# Altium PCB FI_10_7.PcbDoc
Units mm, origin at the board's own origin, x right, y up, seen from the top; angles counter-clockwise.
Board outline 65 x 37 mm, 2 copper layers (Top Layer, Bottom Layer), stack 1.571 mm thick; 58 components, 31 nets, 137 pads, 2 vias.
Unrouted connection lines stored in the file: 2.
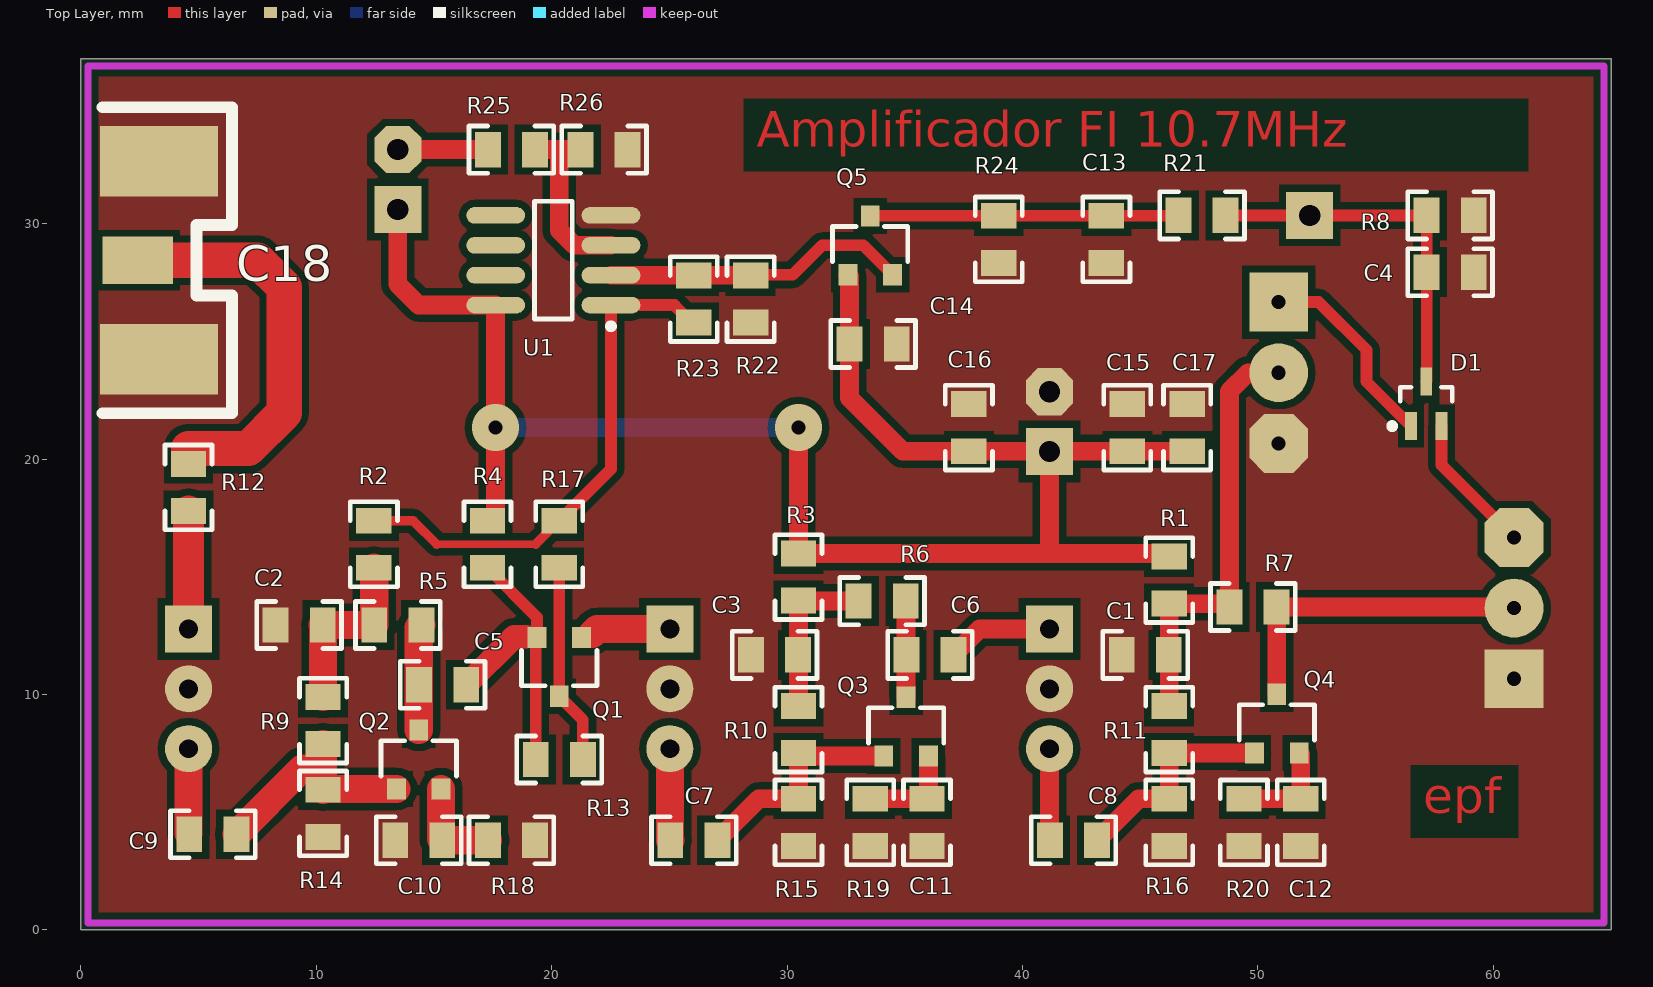
[diagram p0: Top Layer view]
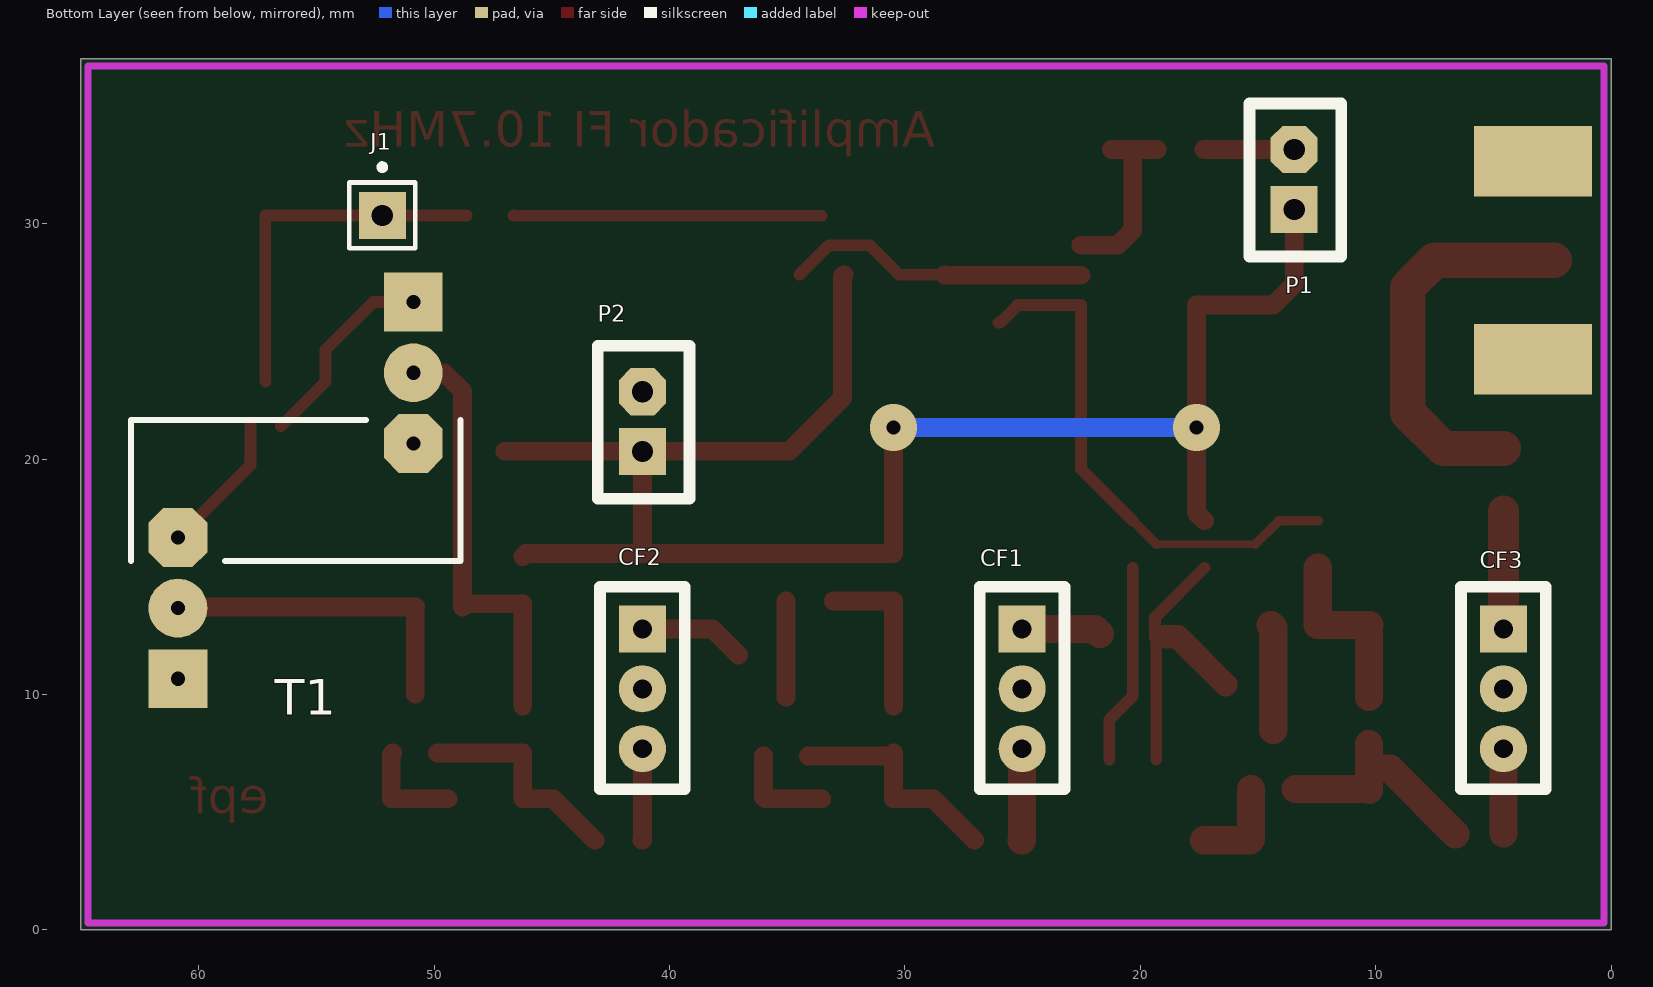
[diagram p1: Bottom Layer view, seen from below]
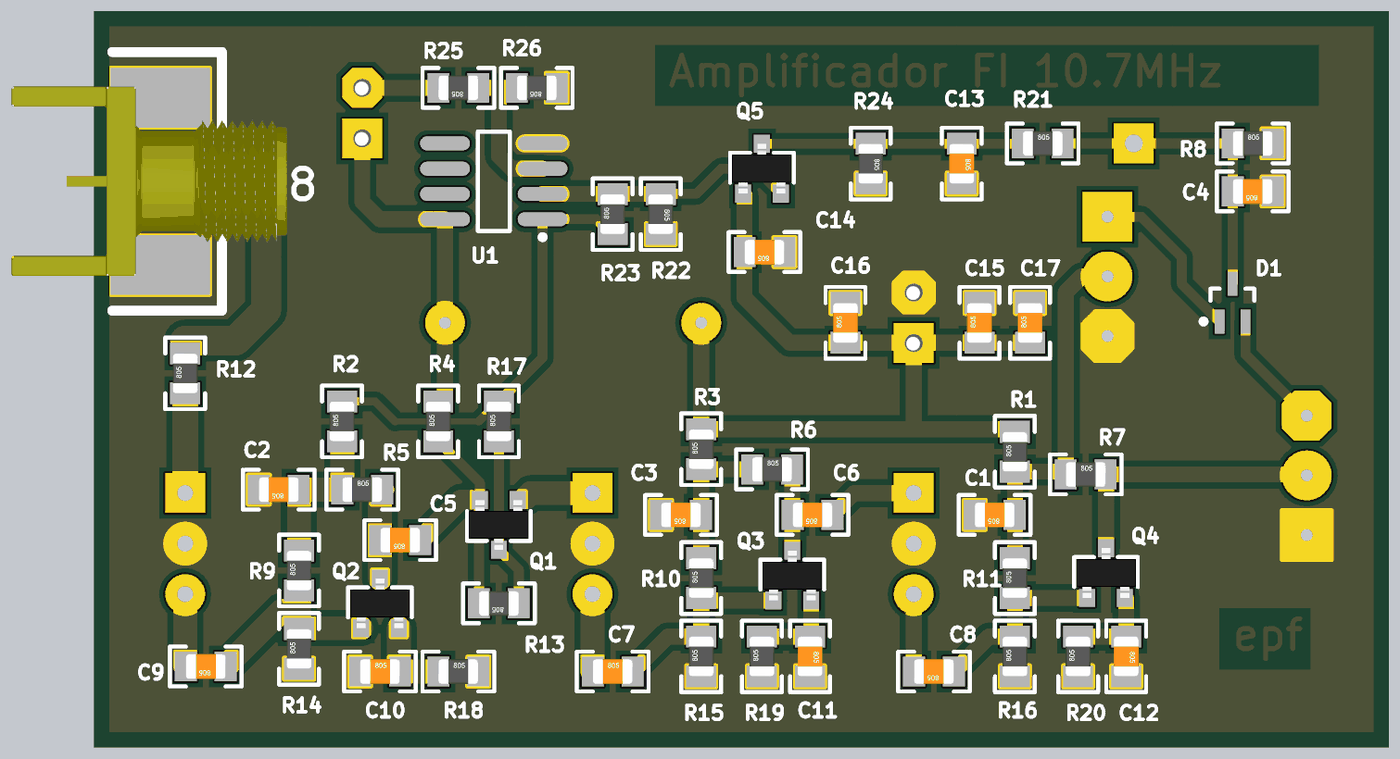
[diagram p2: 3D render of the assembled board from above, using the file's embedded part models]

## Layer stack, top to bottom
Top Layer: signal copper 0.0356
Dielectric: core 1.5, FR-4, Dk 4.8
Bottom Layer: signal copper 0.0356

## Board outline
0,0 65,0 65,37 0,37

## Design rules (kind name [scope] priority, off if disabled: settings)
Clearance [All] p1: gap=0.3
PolygonConnect [All] p1: connectstyle=Direct reliefconductorwidth=0.254 reliefentries=4 polygonreliefangle="90 Angle"
RoomDefinition FI_10_7 [InComponentClass('FI_10_7')] p1: confinementstyle=ConfineIn formatcopy=TRUE lockcomponents=FALSE outline -11.049,-0.254 65.024,-0.254 65.024,37.211 -11.049,37.211
RoutingVias [All] p1: holewidth=0.6 width=2 viastyle="Through Hole" minholewidth=0.3 minwidth=1.27 maxholewidth=2 maxwidth=3
SilkscreenOverComponentPads [All] p1: minsilkscreentomaskgap=0
SolderMaskExpansion [All] p1: expansion=0.102
TestPointUsage [All] p1: valid=0 allowmultiple=FALSE
Testpoint [All] p1: side=15 testpointundercomponent=TRUE minsize=1.016 maxsize=2.54 preferedsize=1.524 minholesize=0 maxholesize=1.016 preferedholesize=0.813 testpointgrid=0.025 style=1023 order=0-112345678
Width [All] p1: maxlimit=4 minlimit=0.3 preferedwidth=2
23 further rules are at their usual default settings.

## Components (designator, comment, footprint, x,y, rotation, side; value= is the part's Value field where it differs from the comment)
C1 "Capacitor" 0805_CAP 45.212,11.684 r180 top
C2 "Capacitor" 0805_CAP 9.271,12.954 r180 top
C3 "Capacitor" 0805_CAP 29.464,11.684 r180 top
C4 "Capacitor" 0805_CAP 58.166,27.94 r180 top
C5 "Capacitor" 0805_CAP 15.367,10.414 r180 top
C6 "Capacitor" 0805_CAP 36.068,11.684 r180 top
C7 "Capacitor" 0805_CAP 26.035,3.81 r0 top
C8 "Capacitor" 0805_CAP 42.164,3.81 r180 top
C9 "Capacitor" 0805_CAP 5.604,4.064 r180 top
C10 "Capacitor" 0805_CAP 14.351,3.81 r0 top
C11 "Capacitor" 0805_CAP 35.941,4.572 r90 top
C12 "Capacitor" 0805_CAP 51.816,4.572 r90 top
C13 "Capacitor" 0805_CAP 43.561,29.337 r90 top
C14 "Capacitor" 0805_CAP 33.655,24.892 r180 top
C15 "Capacitor" 0805_CAP 44.45,21.336 r270 top
C16 "Capacitor" 0805_CAP 37.719,21.336 r270 top
C17 "Capacitor" 0805_CAP 46.99,21.336 r270 top
C18 "SMA" SMAL2 2.413,28.448 r90 top
CF1 "Filtro_ceramico" Filter_10_7 25.019,12.78 r270 bottom
CF2 "Filtro_ceramico" Filter_10_7 41.148,12.78 r270 bottom
CF3 "Filtro_ceramico" Filter_10_7 4.572,12.78 r270 bottom
D1 "BAS70-05W" SOT323_N 57.15,22.352 r90 top
J1 "Socket" PIN1 52.197,30.353 r180 bottom
P1 "Header2" Header2Hembra 13.462,30.607 r90 bottom
P2 "Header2" Header2Hembra 41.148,20.32 r90 bottom
Q1 "PMBF4391" SOT23 20.32,11.176 r180 top
Q2 "BFS17" SOT23 14.351,7.239 r0 top
Q3 "BFS17" SOT23 35.052,8.636 r0 top
Q4 "BFS17" SOT23 50.8,8.763 r0 top
Q5 "PMBF4391" SOT23 33.528,29.083 r0 top
R1 "Resistor" 0805_RES 46.228,14.859 r270 top
R2 "Resistor" 0805_RES 12.446,16.383 r270 top
R3 "Resistor" 0805_RES 30.48,14.986 r270 top
R4 "Resistor" 0805_RES 17.272,16.383 r270 top
R5 "Resistor" 0805_RES 13.462,12.954 r0 top
R6 "Resistor" 0805_RES 34.036,13.97 r0 top
R7 "Resistor" 0805_RES 49.784,13.716 r0 top
R8 "Resistor" 0805_RES 58.166,30.353 r0 top
R9 "Resistor" 0805_RES 10.287,8.89 r270 top
R10 "Resistor" 0805_RES 30.48,8.509 r270 top
R11 "Resistor" 0805_RES 46.228,8.509 r270 top
R12 "Resistor" 0805_RES 4.572,18.796 r270 top
R13 "Resistor" 0805_RES 20.32,7.239 r180 top
R14 "Resistor" 0805_RES 10.287,4.953 r270 top
R15 "Resistor" 0805_RES 30.48,4.572 r270 top
R16 "Resistor" 0805_RES 46.228,4.572 r270 top
R17 "Resistor" 0805_RES 20.32,16.383 r270 top
R18 "Resistor" 0805_RES 18.288,3.81 r0 top
R19 "Resistor" 0805_RES 33.528,4.572 r270 top
R20 "Resistor" 0805_RES 49.403,4.572 r270 top
R21 "Resistor" 0805_RES 47.625,30.353 r0 top
R22 "Resistor" 0805_RES 28.448,26.797 r90 top
R23 "Resistor" 0805_RES 26.035,26.797 r270 top
R24 "Resistor" 0805_RES 38.989,29.337 r90 top
R25 "Resistor" 0805_RES 18.288,33.147 r180 top
R26 "Resistor" 0805_RES 22.225,33.147 r180 top
T1 "Transformer" NTH12_V_3Ind_2 55.88,18.669 r270 bottom
U1 "MC1458D" 751-05_M 20.066,28.448 r180 top

## Footprints (in the part's own frame and the unit in brackets; to place one, negate y for a bottom-side part, rotate by r counter-clockwise, add the part's x,y. Pads: shape width x height; smd on the part's side, far side on the other; paste and mask are expansions set on the pad)
751-05_M [mm] "SOIC, 8-Leads, Body 4.9x3.9mm, Pitch 1.27mm, IPC Low Density"
  oval 2.5x0.7 smd: 1(-2.45,1.905) 2(-2.45,0.635) 3(-2.45,-0.635) 4(-2.45,-1.905) 5(2.45,-1.905) 6(2.45,-0.635) 7(2.45,0.635) 8(2.45,1.905)
  silkscreen extent -2.57,-2.5 0.8,2.93, body extent -2,-2.5 2,2.5, height 1.75
0805_CAP [mm]
  rect 1.1x1.5 smd: 1(-1,0) 2(1,0)
  silkscreen extent -1.8,-1 1.8,1, body extent -1,-0.62 1,0.63, height 0.78
0805_RES [mm]
  rect 1.1x1.5 smd: 1(-1,0) 2(1,0)
  silkscreen extent -1.8,-1 1.8,1, body extent -1,-0.62 1,0.63, height 0.78
Filter_10_7 [mm]
  rect 2x2 hole 0.8: 1(0,0)
  round 2 hole 0.8: 2(2.54,0) 3(5.08,0)
  silkscreen extent -1.8,-1.8 6.8,1.8
Header2Hembra [mm]
  rect 2x2 hole 0.9: 1(0,0)
  oct 2x2 hole 0.9: 2(2.54,0)
  silkscreen extent -2,-2 4.5,1.9, body extent -1.3,-1.3 3.78,1.24, height 6.02
NTH12_V_3Ind_2 [mm]
  round 2.5 hole 0.6: 1(-5,5) 2(5,-5)
  rect 2.5x2.5 hole 0.6: 3(-8,5) 4(8,-5)
  oct 2.5x2.5 hole 0.6: 5(-2,5) 6(2,-5)
  silkscreen extent -3,-7 3,7
PIN1 [mm] "Connector; Plug"
  rect 2x2 hole 0.9: 1(0,0)
  silkscreen extent -1.4,-1.4 1.4,2.17
SMAL2 [mm]
  rect 2x3 smd: 1(0,0)
  rect 3x5 smd: 2(-4.2,-0.9) 4(4.2,-0.9)
  rect 3x5 smd far side: 3(-4.2,-0.9) 5(4.2,-0.9)
  silkscreen extent -6.5,-4 6.5,1.5, body extent -4.76,-2.95 4.76,10.88, height 4.06
SOT23 [mm]
  rect 0.8x0.9 smd: 1(-0.95,-1.25) 2(0.95,-1.25) 3(0,1.25)
  silkscreen extent -1.6,-0.7 1.6,0.8, body extent -1.5,-1.25 1.5,1.25, height 1.05
SOT323_N [mm] "SOT323, 3-Leads, Body 2.0x1.3mm, Pitch 0.65mm, Lead Span 2.1mm, IPC Medium Density"
  rect 1.2x0.5 smd: 1(-0.95,0.65) 2(-0.95,-0.65) 3(0.95,0)
  silkscreen extent -1.07,-1.1 0.7,1.57, body extent -0.7,-1.1 0.7,1.1, height 1.1

## Part data
C1 C2 C3 C4 C5 C6 C7 C8 C9 C10 C11 C12 C13 C14 C15 C16 C17: library part Cap
CF1 CF2 CF3: library part Filter_10_7
D1: library part BAS70-04W, "Schottky Barrier Double Diode"
Q1 Q5: "N-channel Silicon Junction Field-effect Transistor"
Q2 Q3 Q4: "NPN 1 GHz Wideband Transistor"
R1 R2 R3 R4 R5 R6 R7 R8 R9 R10 R11 R12 R13 R14 R15 R16 R17 R18 R19 R20 R21 R22 R23 R24 R25 R26: library part Res
T1: library part Transformador3, "Transformador 3 bobinas"
U1: "Dual Operational Amplifier, Internally Compensated"

## Via types
v1: diameter 2, hole 0.6, Top Layer to Bottom Layer, 2 vias

## Nets (pads, with @x,y where several pads share a name; then routed paths per layer and width w, separated by ;. In a path a pad name is that pad's centre, name@x,y a point inside that pad or via, vN(x,y) a via of type N, cw(c..) or ccw(c..) an arc to the next point about the centre after c; other vN are vias at no path point)
CAG: R2.1 R17.1 R23.2 U1.1 | length 22.6
  Top Layer w0.3: 15.113,16.383 19.313,16.383
  Top Layer w0.4: R2.1 14.113,17.383 15.113,16.383 ; 19.313,16.383 20.313,17.383 R17.1
  Top Layer w0.5: R17.1 22.516,19.579 U1.1 25.211,26.543 25.957,25.797 R23.2
GND: C1.2 C2.2 C3.2 C4.1 C10.1 C11.1 C12.1 C13.1 C14.1 C15.1 C16.1 C17.1 C18.2 C18.3 C18.4 C18.5 CF1.2 CF2.2 CF3.2 P2.2 R8.2 R14.2 R15.2 R16.2 R18.2 R19.2 R20.2 R22.1 R24.1 R26.1 T1.4 T1.5 U1.4
NetC1_1: C1.1 R1.2 R7.1 R11.1 T1.1 | length 18.5
  Top Layer w0.8: R11.1 R1.2 48.641,13.859 R7.1 48.784,22.876 49.577,23.669 T1.1
NetC2_1: C2.1 R2.2 R5.1 R9.1 | length 7.7
  Top Layer w1.2: R9.1 10.287,12.938 C2.1 R5.1 12.462,15.367 R2.2
NetC3_1: C3.1 R3.2 R6.1 R10.1 | length 7
  Top Layer w0.8: R10.1 R3.2 30.496,13.97 R6.1
NetC4_2: C4.2 D1.3 J1.1 R8.1 R21.2 | length 15.6
  Top Layer w0.5: R21.2 J1.1 R8.1 C4.2 57.166,23.318 D1.3
NetC5_1: C5.1 Q1.2 R4.2 R13.2 | length 12.4
  Top Layer w0.5: R4.2 19.37,13.285 Q1.2 19.32,12.376 R13.2
  Top Layer w1: C5.1 18.399,12.446 18.923,12.446
NetC5_2: C5.2 Q2.3 R5.2 | length 4.5
  Top Layer w1.2: Q2.3 14.351,12.843 R5.2
NetC6_1: C6.1 CF2.1 | length 4.5
  Top Layer w0.8: C6.1 38.164,12.78 CF2.1
NetC6_2: C6.2 Q3.3 R6.2 | length 4.1
  Top Layer w0.8: R6.2 35.052,13.954 Q3.3
NetC7_1: C7.1 CF1.3 | length 3.9
  Top Layer w1.2: CF1.3 25.019,3.826 C7.1
NetC7_2: C7.2 Q3.1 R10.2 R15.1 | length 9.8
  Top Layer w0.8: C7.2 28.797,5.572 R15.1 R10.2 30.603,7.386 Q3.1
NetC8_1: C8.1 Q4.1 R11.2 R16.1 | length 9.4
  Top Layer w0.8: C8.1 44.926,5.572 R16.1 R11.2 46.232,7.513 Q4.1
NetC8_2: C8.2 CF2.3 | length 3.9
  Top Layer w0.8: CF2.3 41.148,3.826 C8.2
NetC9_1: C9.1 Q2.1 R9.2 R14.1 | length 9.9
  Top Layer w1.2: C9.1 9.398,6.858 10.287,6.858 ; R9.2 10.287,6.858 ; Q2.1 10.323,5.989 R14.1 10.287,6.858
NetC9_2: C9.2 CF3.3 | length 3.6
  Top Layer w1: C9.2@4.572,4.096 C9.2
  Top Layer w1.2: C9.2@4.572,4.096 CF3.3
NetC10_2: C10.2 Q2.2 R18.1 | length 4.1
  Top Layer w1.2: Q2.2 15.301,3.86 C10.2 R18.1
NetC11_2: C11.2 Q3.2 R19.1 | length 4.3
  Top Layer w0.8: R19.1 C11.2 36.002,5.633 Q3.2
NetC12_2: C12.2 Q4.2 R20.1 | length 4.4
  Top Layer w0.8: R20.1 C12.2 51.816,7.447 Q4.2
NetC13_2: C13.2 Q5.3 R21.1 R24.2 | length 13.1
  Top Layer w0.5: Q5.3 38.985,30.333 R24.2 C13.2 46.609,30.337 R21.1
NetC18_1: C18.1 R12.1 | length 16.7
  Top Layer w1.5: C18.1 7.493,28.448 8.636,27.305 8.636,21.971 7.112,20.447 4.572,20.447
NetCF1_1: CF1.1 Q1.1 | length 3.4
  Top Layer w1.2: 21.717,12.573 21.924,12.78 CF1.1
NetCF3_1: CF3.1 R12.2 | length 5
  Top Layer w1.3: CF3.1 R12.2
NetD1_1: D1.1 T1.3 | length 8.6
  Top Layer w0.5: T1.3 52.579,26.669 54.61,24.638 54.61,23.292 D1.1
NetD1_2: D1.2 T1.6 | length 6
  Top Layer w0.5: D1.2 57.8,19.749 T1.6
NetP1_2: P1.2 R25.2 | length 3.8
  Top Layer w0.8: P1.2 R25.2
NetQ1_3: Q1.3 R13.1 R17.2 | length 8.6
  Top Layer w0.5: R17.2 Q1.3 21.32,8.926 R13.1
NetQ4_3: Q4.3 R7.2 T1.2 | length 13.8
  Top Layer w0.8: Q4.3 50.8,13.7 R7.2 60.833,13.716 T1.2
NetQ5_2: Q5.2 R22.2 R23.1 U1.2 | length 13
  Top Layer w0.5: R22.2@28.321,27.829 30.242,27.829 31.496,29.083 33.228,29.083 Q5.2
  Top Layer w0.8: U1.2 28.305,27.813 R22.2@28.321,27.829
NetR25_1: R25.1 R26.2 U1.3 | length 7.9
  Top Layer w0.8: R25.1 20.574,33.147 ; R26.2 20.574,33.147 ; U1.3 20.955,29.083 20.32,29.718 20.32,32.893 20.574,33.147
VCC: C14.2 C15.2 C16.2 C17.2 P1.1 P2.1 Q5.1 R1.1 R3.1 R4.1 U1.8 | length 75.9
  Top Layer w0.8: P1.1 13.462,27.432 14.351,26.543 U1.8 17.616,17.727 R4.1 ; v1(30.48,21.336) R3.1 41.148,15.986 ; Q5.1 32.655,27.756 C14.2 32.655,22.59 34.909,20.336 C16.2 C15.2 C17.2 ; P2.1 41.148,15.986 ; R1.1 46.101,15.986 41.148,15.986
  Bottom Layer w0.8: v1(17.616,21.336) v1(30.48,21.336)
pads on no net: U1.5 U1.6 U1.7

## Polygon pours and split planes (outlines as drawn)
GND on Top Layer "GND_Top" (solid, remove dead copper): 0.3,36.7 0.3,0.3 64.7,0.3 64.7,36.7

## Keep-outs
Keep-Out Layer:
  lines w0.3: 0.3,0.3 64.7,0.3 64.7,36.7 0.3,36.7 0.3,0.3

## Other copper
Top Layer:
  text "Amplificador FI 10.7MHz" at 28.702,33.274 h1.5
  text "epf" at 57.023,4.953 h1.5

## Dimensions
0.3,0.3 to 64.7,0.3 on Mechanical 1
0.3,0.3 to 0.3,36.7 on Mechanical 1